# Altium PCB LED_Al.PcbDoc
Units mm, origin at the board's own origin, x right, y up, seen from the top; angles counter-clockwise.
Board outline 104.14 x 127 mm, 2 copper layers (Top Layer, Bottom Layer); 19 components, 31 nets, 78 pads, 0 vias.
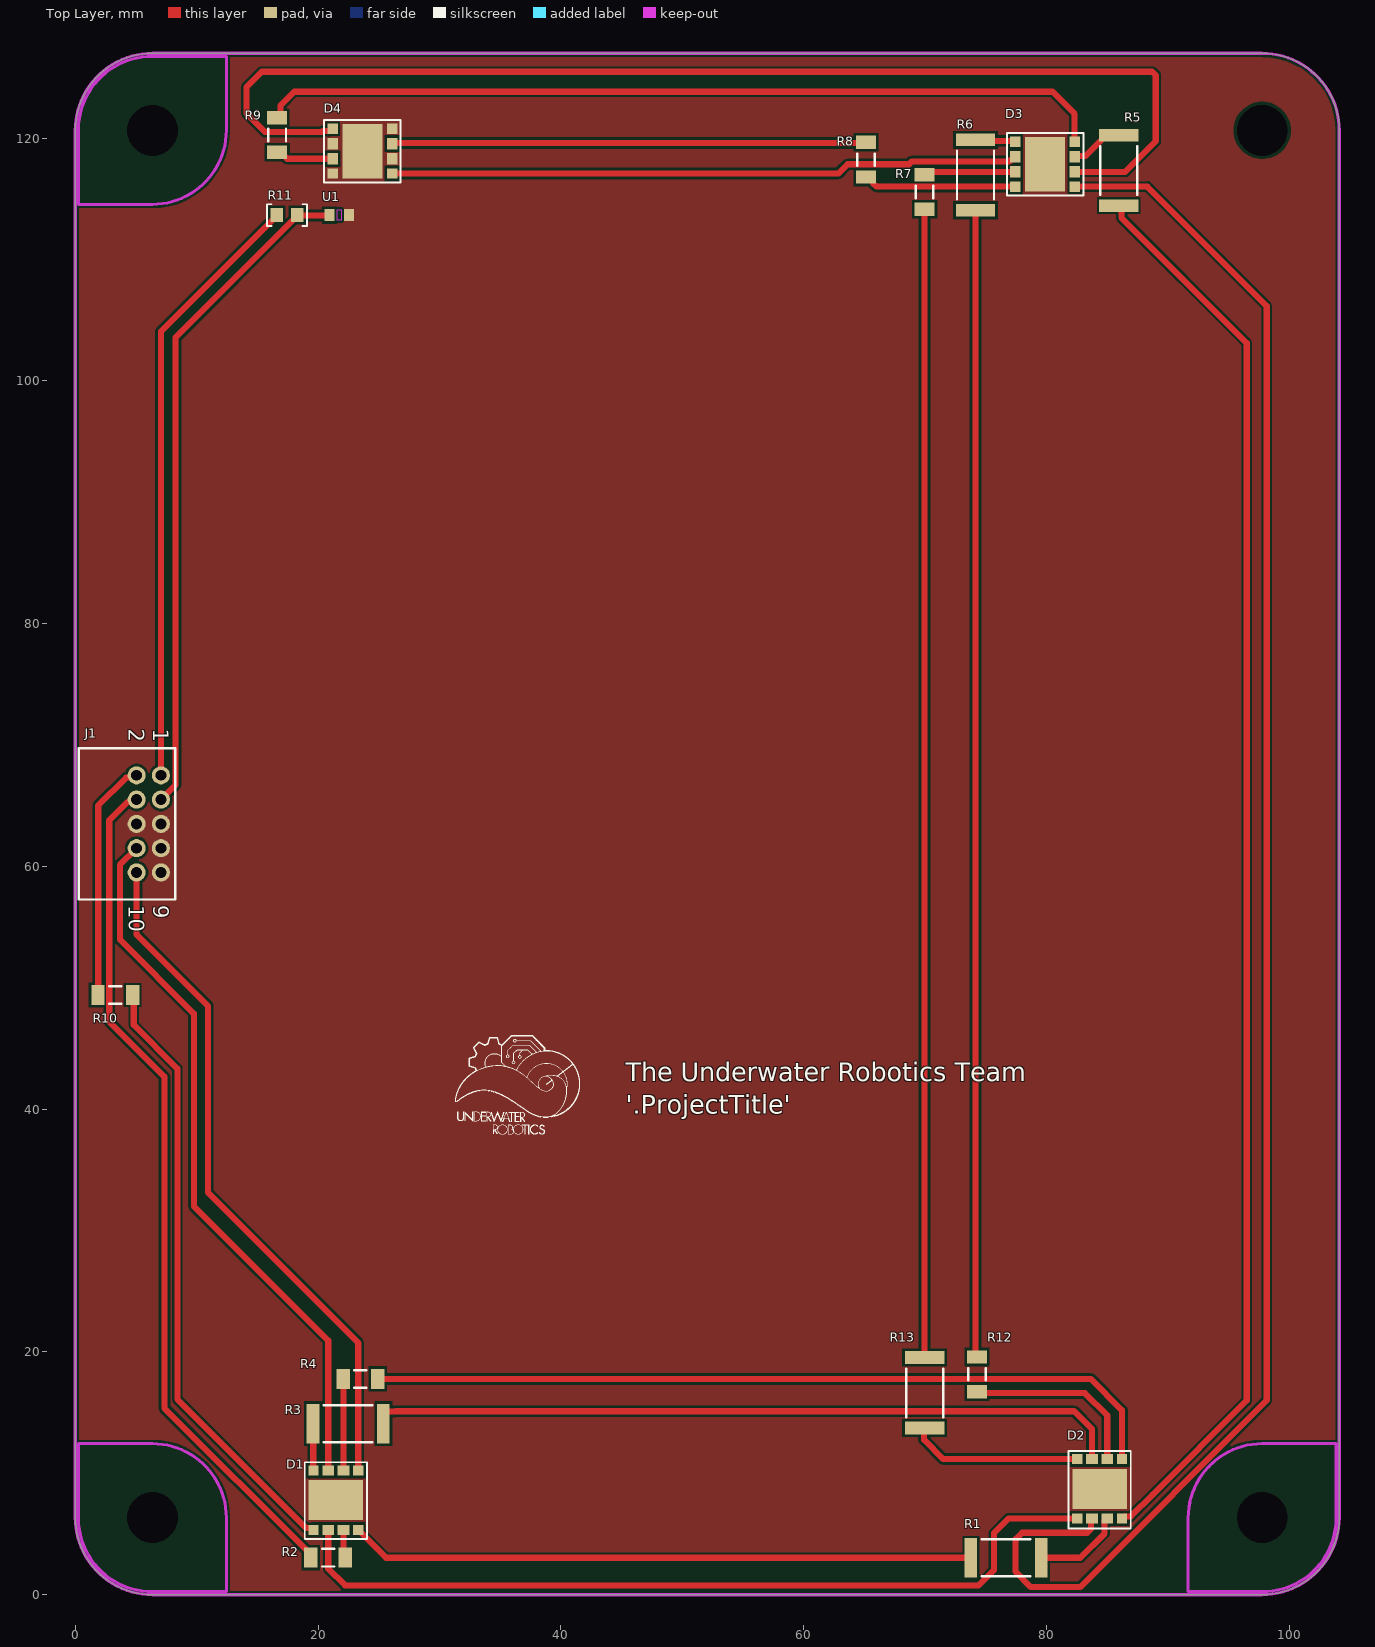
[diagram p0: Top Layer view]
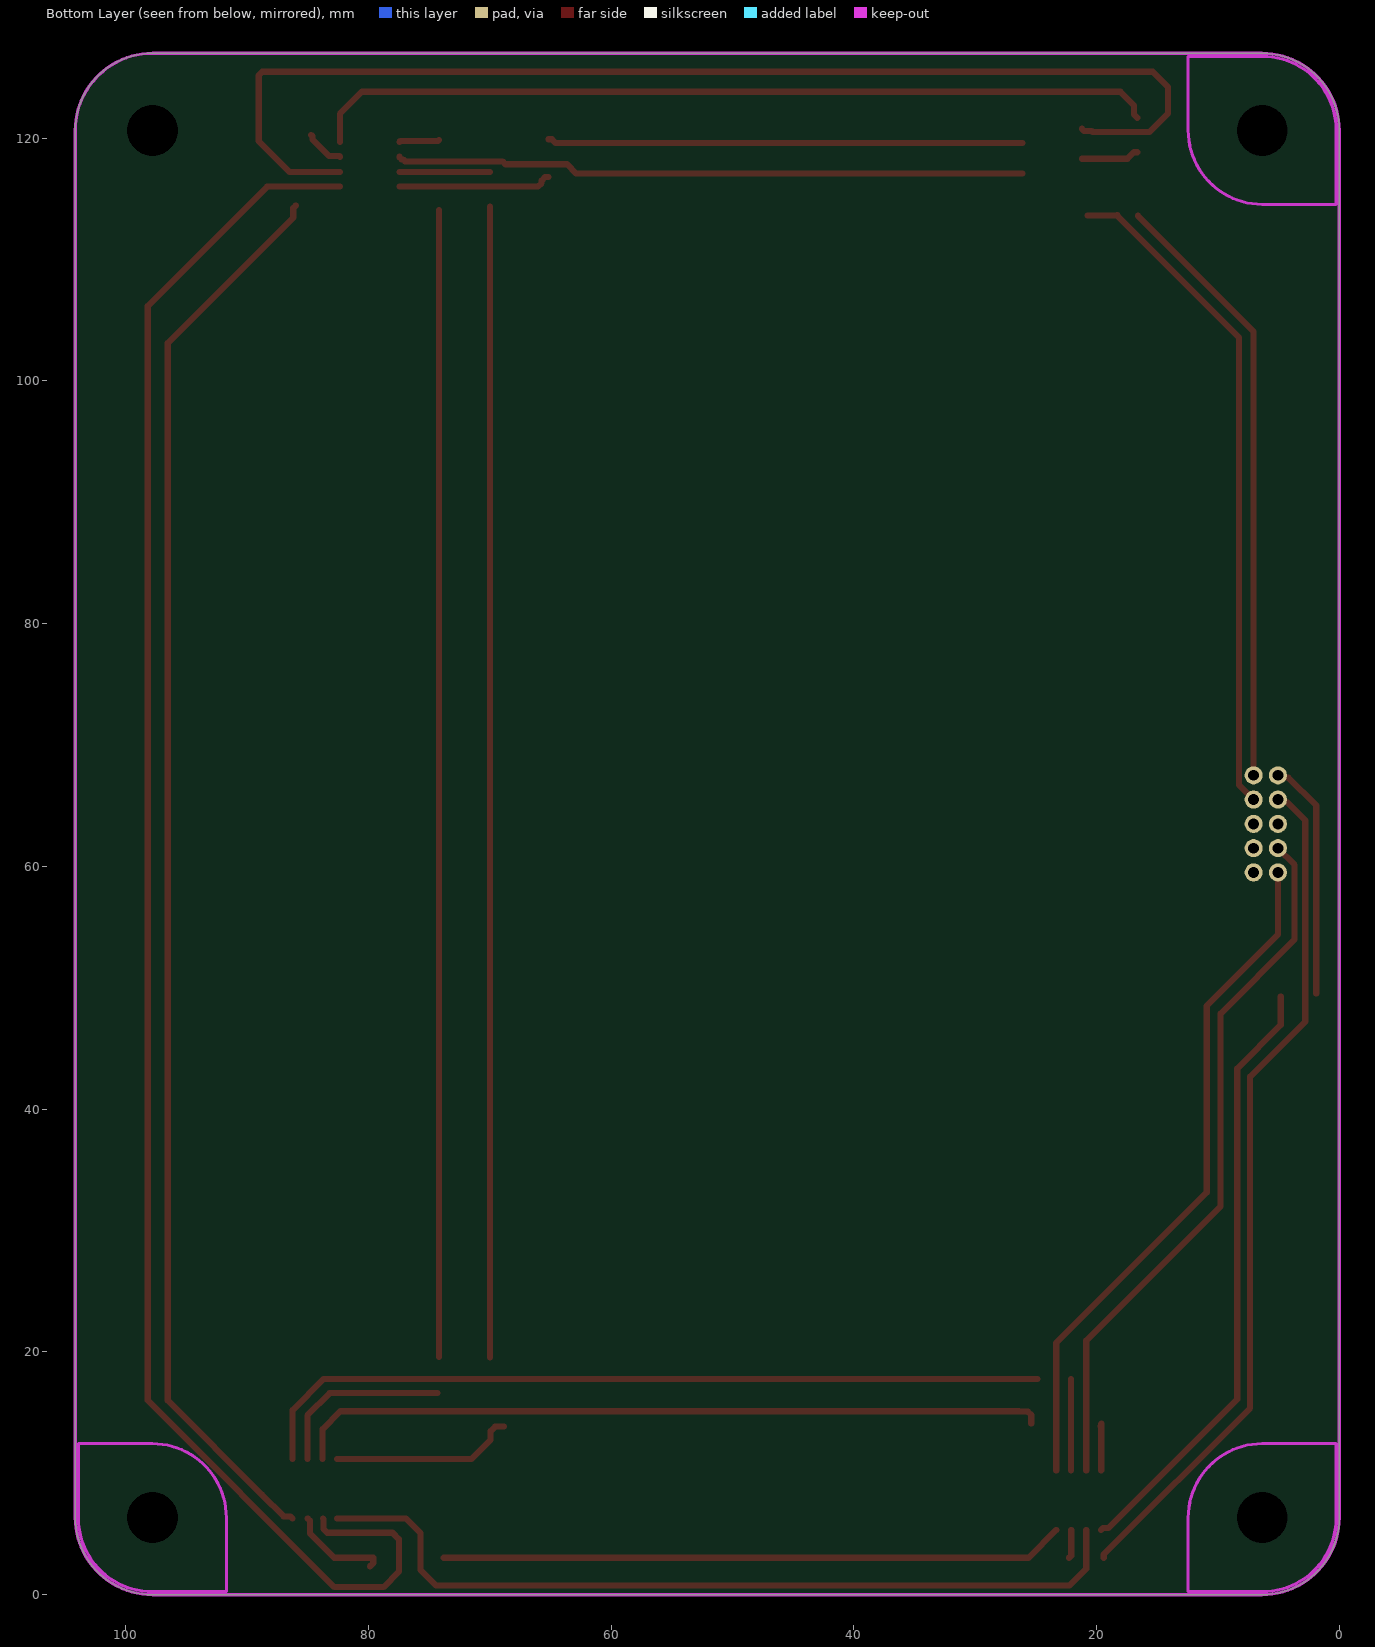
[diagram p1: Bottom Layer view, seen from below]

## Layer stack, top to bottom
Top Solder: solder mask 0.0102, Solder Resist, Dk 3.5
Top Layer: signal copper 0.0356
Dielectric 1: dielectric 0.32, FR-4, Dk 4.8
Bottom Layer: signal copper 0.0356
Bottom Solder: solder mask 0.0102, Solder Resist, Dk 3.5

## Board outline
0,6.35 0,120.65 cw(c6.35,120.65) 6.35,127 97.79,127 cw(c97.79,120.65) 104.14,120.65 104.14,6.35 cw(c97.79,6.35) 97.79,0 6.35,0 cw(c6.35,6.35)

## Design rules (kind name [scope] priority, off if disabled: settings)
AcuteAngle [All] p1: minimum=6.00000000000000E+0001 checktracksonly=FALSE
BoardOutlineClearance "BoardOutlineClearance JLCPCB" [All] p1: gap=0.2 ignorepadtopadclearanceinfootprint=FALSE
Clearance "Clearance JLCPCB 4 layer" [All] p1: gap=0.2 ignorepadtopadclearanceinfootprint=FALSE except(0.09: Arc-Arc Arc-Track Track-Track; 0.127: Arc-SMDPad Track-SMDPad SMDPad-SMDPad; 0.254: Arc-Hole Track-Hole SMDPad-Hole THPad-Hole Via-Hole Fill-Hole Poly-Hole Region-Hole Text-Hole)
DiffPairsRouting [All] p1: maxlimit=0.254 minlimit=0.152 mostfreqgap=0.203 toplayer_minwidth=0.09 toplayer_maxwidth=0.381 toplayer_prefwidth=0.203 bottomlayer_minwidth=0.09 bottomlayer_maxwidth=0.381 bottomlayer_prefwidth=0.203 maxuncoupledlength=12.7
HoleSize "HoleSize JLCPCB Pad" [IsPad] p1: absolutevalues=TRUE maxlimit=6.3 minlimit=0.5 maxpercent=80.000 minpercent=20.000
HoleSize "HoleSize JLCPCB 4 layer" [All] p2: absolutevalues=TRUE maxlimit=6.3 minlimit=0.2 maxpercent=80.000 minpercent=20.000
HoleToHoleClearance "HoleToHoleClearance JLCPCB" [All] p1: gap=0.254 allowstackedmicrovias=TRUE
MinimumAnnularRing "MinimumAnnularRing JLCPCB Pad" [IsPad] p1: minimumring=0.3
MinimumAnnularRing "MinimumAnnularRing JLCPCB 1oz" [All] p2: minimumring=0.13
MinimumSolderMaskSliver [All] p1: minsoldermaskwidth=0.025
PlaneConnect [All] p1: pad.planeconnectstyle=Relief pad.reliefexpansion=0.508 pad.reliefentries=4 pad.reliefconductorwidth=0.254 pad.reliefairgap=0.254 via.planeconnectstyle=Direct via.reliefexpansion=0.508 via.reliefentries=4 via.reliefconductorwidth=0.254 via.reliefairgap=0.254
PolygonConnect [All] p1: connectstyle=Direct reliefconductorwidth=0.381 reliefentries=4 polygonreliefangle="45 Angle" airgapwidth=0.254
RoutingVias "RoutingVias JLCPCB 4 layer" [All] p1: holewidth=0.5 width=1 viastyle="Through Hole" minholewidth=0.2 minwidth=0.4 maxholewidth=1.27 maxwidth=2.032
SilkToSilkClearance [All] p1: silktosilkclearance=0.076
SilkToSolderMaskClearance "SilkToSolderMaskClearance JLCPCB" [IsPad] p1: minsilkscreentomaskgap=0.15 clearancetoexposedcopper=TRUE
SolderMaskExpansion "SolderMaskExpansion JLCPCB" [All] p1: expansion=0.05 istentingtop=FALSE
Width "Width JLCPCB 4 layer" [All] p1: maxlimit=5 minlimit=0.09 preferedwidth=0.508 bottomlayer_prefwidth=0.25 minimp=50.000000 maximp=50.000000 favimp=50.000000
23 further rules are at their usual default settings.

## Classes and differential pairs
component class LED_aluminum: D1 D2 D3 D4 J1 R1 R2 R3 R4 R5 R6 R7 R9 R10 R11 R12 R13 U1

## Components (designator, comment, footprint, x,y, rotation, side; value= is the part's Value field where it differs from the comment)
D1 "LE_RTDUW_S2WM" LE_RTDUW_S2WM 21.473,7.785 r0 top
D2 "LE_RTDUW_S2WM" LE_RTDUW_S2WM 84.394,8.725 r0 top
D3 "LE_RTDUW_S2WM" LE_RTDUW_S2WM 79.883,117.856 r90 top
D4 "LE_RTDUW_S2WM" LE_RTDUW_S2WM 23.66,118.933 r270 top
J1 "10pos 3.8A conn" SAMTEC-LS2-105-01-X-D-RA2 9.245,70.749 r270 top
R1 "Jumper 2512(6432)" RESC2512(6432)_L 76.687,3.048 r180 top value="0.00 Ohm"
R2 "ERJ-8GEY0R00V" RESC3216X70X50NL05T20 20.828,3.048 r0 top
R3 "Jumper 2512(6432)" RESC2512(6432)_L 22.479,14.097 r0 top value="0.00 Ohm"
R4 "ERJ-8GEY0R00V" RESC3216X70X50NL05T20 23.495,17.78 r0 top
R5 "Jumper 2512(6432)" RESC2512(6432)_L 85.979,117.348 r270 top value="0.00 Ohm"
R6 "Jumper 2512(6432)" RESC2512(6432)_L 74.168,116.967 r90 top value="0.00 Ohm"
R7 "ERJ-8GEY0R00V" RESC3216X70X50NL05T20 69.977,115.57 r90 top
R8 "ERJ-8GEY0R00V" RESC3216X70X50NL05T20 65.151,118.237 r90 top
R9 "ERJ-8GEY0R00V" RESC3216X70X50NL05T20 16.637,120.269 r90 top
R10 "ERJ-8GEY0R00V" RESC3216X70X50NL05T20 3.296,49.413 r0 top
R11 "10k Ohm 0.5% 1/10W" RESISTOR_0603 17.441,113.671 r180 top
R12 "ERJ-8GEY0R00V" RESC3216X70X50NL05T20 74.295,18.161 r90 top
R13 "Jumper 2512(6432)" RESC2512(6432)_L 69.977,16.637 r90 top value="0.00 Ohm"
U1 "NTCS0603E3223FMT" NTCS0603_VIS 21.749,113.665 r0 top

## Footprints (in the part's own frame and the unit in brackets; to place one, negate y for a bottom-side part, rotate by r counter-clockwise, add the part's x,y. Pads: shape width x height; smd on the part's side, far side on the other; paste and mask are expansions set on the pad)
LE_RTDUW_S2WM [mil]
  rect 33.5x33.5 smd: 1(72.6,-96.5) 4(-72.6,-96.5) 5(-72.6,96.5) 8(72.6,96.5)
  rect 37.4x33.5 smd: 2(24.6,-96.5) 3(-24.6,-96.5) 6(-24.6,96.5) 7(24.6,96.5)
  rect 177.17x129.92 smd: 9(0,0)
  silkscreen extent -101,-125 101,123, body extent -93,-113 91,113, height 52
NTCS0603_VIS [mm]
  rect 0.8x1 smd paste+0 mask+0: 1(-0.8,0) 2(0.8,0)
  Top Layer keep-out region: -0.176,-0.441 -0.176,0.457 0.168,0.457 0.168,-0.441
  body extent -0.88,-0.47 0.88,0.47, height 0.94
RESC2512(6432)_L [mm] "Chip Resistor, Body 6.4x3.2mm, IPC High Density"
  rect 1.05x3.25 smd: 1(-2.9,0) 2(2.9,0)
  silkscreen extent -2,-1.52 2,1.53, body extent -3.25,-1.7 3.25,1.7, height 0.75
RESC3216X70X50NL05T20 [mm] "Chip Resistor, 2-Leads, Body 3.20x1.60mm, IPC Medium Density"
  rect 1.1x1.65 smd: 1(-1.425,0) 2(1.425,0)
  silkscreen extent -0.5,-0.72 0.5,0.72, body extent -1.63,-0.82 1.62,0.82, height 0.7
RESISTOR_0603 [mil] "Resistor 0603"
  rect 40x45 smd: 1(-33.5,0) 2(33.5,0)
  silkscreen extent -65,-35 65,35, body extent -31,-16 32,16, height 16
SAMTEC-LS2-105-01-X-D-RA2 [mm]
  round 1.49 hole 0.89 mask+0: 1(3.239,-2.191) 2(3.239,-4.191) 3(5.239,-2.191) 4(5.239,-4.191) 5(7.239,-2.191) 6(7.239,-4.191) 7(9.239,-2.191) 8(9.239,-4.191) 9(11.239,-2.191) 10(11.239,-4.191)
  silkscreen extent 1.01,-8.94 13.47,-0.99, body extent 1.52,-12.41 13.09,-2.03, height 5.29

## Part data
D1 D2 D3 D4: "LED OSTAR RGBW 625/527/453NM SMD", Supplier Part Number 1=720-LERTDUWS2WMA2120, Supplier 1=Mouser
J1: library part SAMTEC-LS2-105-01-X-D-RA2, "10 Position Connector Self Mating, Non-Gendered, Hermaphroditic Through Hole, Right Angle Gold", Package=None, Supplier Part Number 1=200-LS210501FDRA2, Availability=Unavailable, MP=SAMTEC-LS2-105-01-X-D-RA2, Price=None, Supplier 1=Mouser
R1 R3 R5 R6 R13: library part CMP-1018-00001-1, "Jumper 2512 (6432 Metric)", Case-EIA=2512, Case-Metric=6432, Power=None, Technology=SMT, Tolerance=None
R2 R4 R7 R8 R9 R10 R12: library part CMP-2003-00541-1, Manufacturer=Panasonic, Part Number=ERJ-8GEY0R00V
R11: library part RESISTOR_10K_0.5%_0603, "RES 10k OHM 0.5% 1/10W 0603", Digikey Part Numer=CR0603-JW-104ELFTR-ND, Supplier Part Number 1=749-1695-1-ND, Tolerance="+/- 0.5%", Value  (Ohms)=10K, Made By="Robert Pafford", Supplier=Digikey, Supplier 1=Digi-Key, Wattage=1/10W
U1: library part CMP-00030-42631939-1, "NTCS0603E3223FMT Thermistor NTC 22K Ohm 1% 2-Pin 0603 Surface Mount Solder Pad 3730K -4.5 to -4 T/R Automotive", Case Code (Imperial)=0603, Case Code (Metric)=1608, Max Operating Temperature=150°C, Min Operating Temperature=-40°C, Power Dissipation=125mW, Resistance=22kΩ, Tolerance=1%, Accuracy=1%, Case/Package=0603, Contact Plating=Tin, Depth=800µm, Height=800µm, Length=1.6mm, Mount="Surface Mount", NexarPartId=42631939, Number of Pins=2, Power Rating=125mW, Radiation Hardening=No, REACH SVHC=Unknown, RoHS=Compliant, Schedule B="8533400080, 8533400080", Termination=SMD/SMT, Width=1.6mm

## Free pads (board coordinates)
  round 0 hole 4.191 unplated: 1(6.35,6.35) 1(6.35,120.65) 1(97.79,6.35) 1(97.79,120.65)

## Nets (pads, with @x,y where several pads share a name; then routed paths per layer and width w, separated by ;. In a path a pad name is that pad's centre, name@x,y a point inside that pad or via, vN(x,y) a via of type N, cw(c..) or ccw(c..) an arc to the next point about the centre after c; other vN are vias at no path point)
3V3: J1.1 R11.2 | length 50.1
  Top Layer w0.508: J1.1 7.054,104.071 16.59,113.607 R11.2@16.59,113.645
"Blue Anode": D1.6 J1.8 | length 59
  Top Layer w0.508: J1.8 3.677,60.133 3.677,53.985 9.776,47.886 9.776,32.007 20.848,20.935 D1.6
"Blue D1D2": D2.6 R3.2 | length 62.3
  Top Layer w0.508: R3.2 25.379,14.815 25.65,15.086 26.368,15.086 26.395,15.113 82.296,15.113 83.769,13.64 D2.6
"Blue D2D3": D3.6 R7.2 | length 7.5
  Top Layer w0.508: R7.2@69.977,117.231 D3.6
"Blue D3D4": D4.6 R8.2 | length 39.2
  Top Layer w0.508: D4.6@26.111,119.607 64.567,119.607 64.876,119.916 R8.2@65.151,119.916
GND: D1.9 D2.9 D3.9 D4.1 D4.3 D4.5 D4.7 D4.9 J1.5 J1.6 J1.7 J1.9 U1.2
"Green Anode": J1.2 R10.1 | length 19.7
  Top Layer w0.508: R10.1@1.893,49.54 1.893,65.028 4.187,67.322 4.866,67.322 J1.2
"Green D1D2": D1.3 D2.4 | length 69.5
  Top Layer w0.508: D1.3 20.848,2.139 22.225,0.762 74.422,0.762 75.692,2.032 75.692,5.08 76.886,6.274 D2.4
"Green D2D3": D2.3 D3.4 | length 147.8
  Top Layer w0.508: D3.4 88.331,116.012 98.171,106.172 98.171,16.018 82.788,0.635 78.74,0.635 77.47,1.905 77.47,4.572 78.005,5.107 83.379,5.107 83.677,5.404 83.677,6.231 D2.3@83.72,6.274
"Green D3D4": D3.3 D4.4 | length 98.7
  Top Layer w0.508: D4.4 21.038,120.606 20.403,120.606 20.32,120.523 15.621,120.523 14.097,122.047 14.097,124.206 15.367,125.476 88.729,125.476 89.027,125.178 89.027,119.761 86.497,117.231 D3.3
NetD1_1: D1.1 R1.2 | length 51.4
  Top Layer w0.508: D1.1 25.603,3.048 R1.2
NetD1_2: D1.2 R2.2 | length 2.4
  Top Layer w0.508: D1.2@22.088,5.334 22.088,3.213 R2.2
NetD1_4: D1.4 R10.2 | length 50.4
  Top Layer w0.508: R10.2@4.82,49.286 4.82,46.943 8.411,43.352 8.411,16.1 19.006,5.505 19.458,5.505 D1.4
NetD1_5: D1.5 R3.1 | length 3.9
  Top Layer w0.508: R3.1 19.604,14.072 19.604,10.261 D1.5 ; R3.1@19.629,13.843 R3.1@19.668,13.881
NetD1_7: D1.7 R4.1 | length 7.5
  Top Layer w0.508: D1.7@22.109,10.236 R4.1@22.109,17.78
NetD2_1: D2.1 R5.2 | length 117.1
  Top Layer w0.508: R5.2 86.185,114.242 86.185,113.459 96.52,103.124 96.52,16.002 88.773,8.255 86.963,6.445 86.41,6.445 D2.1
NetD2_5: D2.5 R13.1 | length 15.2
  Top Layer w0.508: R13.1@68.829,13.848 69.547,13.848 69.929,13.466 69.929,12.748 71.501,11.176 D2.5
NetD2_7: D2.7 R12.1 | length 15.1
  Top Layer w0.508: R12.1@74.295,16.609 83.182,16.609 85.019,14.772 D2.7
NetD3_1: D3.1 R9.2 | length 70.1
  Top Layer w0.508: R9.2 16.917,121.974 16.917,122.708 18.034,123.825 80.518,123.825 82.334,122.009 D3.1
NetD3_5: D3.5 R8.1 | length 12.7
  Top Layer w0.508: R8.1 65.426,116.812 65.722,116.516 65.722,116.31 66.02,116.012 D3.5
NetR6_1: R6.1 R12.2 | length 94.5
  Top Layer w0.508: R12.2@74.168,19.586 R6.1
NetR7_1: R7.1 R13.2 | length 94.8
  Top Layer w0.508: R13.2 R7.1@69.977,114.371
"Red Anode": J1.4 R2.1 | length 70.6
  Top Layer w0.508: J1.4 4.866,65.322 4.333,65.322 2.802,63.791 2.802,47.216 7.348,42.67 7.348,15.378 19.403,3.323 R2.1
"Red D1D2": D2.2 R1.1 | length 8.2
  Top Layer w0.508: R1.1 79.587,2.605 R1.1@79.858,2.334 ; R1.1@79.608,3.048 82.804,3.048 84.798,5.042 84.798,6.102 84.969,6.274 D2.2
"Red D2D3": D3.2 R5.1 | length 3.3
  Top Layer w0.508: D3.2 82.383,118.53 83.224,118.53 84.608,119.914 84.608,120.168 R5.1@84.709,120.269
"Red D3D4": D4.2 R9.1 | length 4.8
  Top Layer w0.508: R9.1 16.912,118.844 17.448,118.308 D4.2
Temp: J1.3 R11.1 U1.1 | length 55.2
  Top Layer w0.508: J1.3 8.253,66.709 8.253,103.568 18.292,113.607 R11.1@18.292,113.627 ; R11.1 R11.1@18.292,113.627 ; U1.1@20.721,113.627 R11.1@18.292,113.627
"White Anode": D1.8 J1.10 | length 56.8
  Top Layer w0.508: J1.10 5.054,54.382 10.922,48.514 10.922,33.147 23.317,20.752 D1.8
"White D1D2": D2.8 R4.2 | length 66.5
  Top Layer w0.508: R4.2@24.854,17.78 83.674,17.78 86.238,15.216 D2.8
"White D2D3": D3.8 R6.2 | length 3.3
  Top Layer w0.508: R6.2 74.251,119.784 76.574,119.784 77.348,119.784 D3.8
"White D3D4": D3.7 D4.8 | length 51.9
  Top Layer w0.508: D4.8 62.859,117.089 63.627,117.856 68.698,117.856 68.929,118.087 76.963,118.087 77.136,118.26 77.26,118.26 77.432,118.431 D3.7

## Polygon pours and split planes (outlines as drawn)
GND on Top Layer "GND_L01_P000" (solid, remove dead copper, pour order 0): 0,127 0,0 104.14,0 104.14,127

## Keep-outs
Keep-Out Layer:
  lines w0.254: 0,6.35 ccw(c6.35,6.35) 6.35,0 97.79,0 ccw(c97.79,6.35) 104.14,6.35 104.14,120.65 ccw(c97.79,120.65) 97.79,127 6.35,127 ccw(c6.35,120.65) 0,120.65 0,6.35 ; 0.254,6.35 ccw(c6.35,6.35) 6.35,0.254 12.446,0.254 12.446,6.35 ccw(c6.35,6.35) 6.35,12.446 2.032,12.446 0.254,12.446 0.254,6.35 ; 0.254,114.554 0.254,116.332 0.254,120.65 cw(c6.35,120.65) 6.35,126.746 12.446,126.746 12.446,120.65 cw(c6.35,120.65) 6.35,114.554 0.254,114.554 ; 91.694,0.254 91.694,6.35 cw(c97.79,6.35) 97.79,12.446 103.886,12.446 103.886,6.35 cw(c97.79,6.35) 97.79,0.254 91.694,0.254

## Silkscreen, mask and mechanical layers (free items; w line width, h text height)
Top Overlay:
  drawing of 19 lines, arcs and shapes, not listed
  text "The Underwater Robotics Team" at 45.339,42.291 h1.52
  text "'.ProjectTitle'" at 45.339,39.624 h1.52

## Text inside footprints (layer, text, board x,y; h text height)
J1: Top Overlay "10" at 4.419,56.81 h1.27 r270; Top Overlay "9" at 6.419,56.81 h1.27 r270; Top Overlay "2" at 4.419,71.366 h1.27 r270; Top Overlay "1" at 6.419,71.366 h1.27 r270